# Altium PCB PCB1.PcbDoc
Units mm, origin at the board's own origin, x right, y up, seen from the top; angles counter-clockwise.
Board outline 152.4 x 101.6 mm, 2 copper layers (Top Layer, Bottom Layer); 20 components, 19 nets, 52 pads, 0 vias.
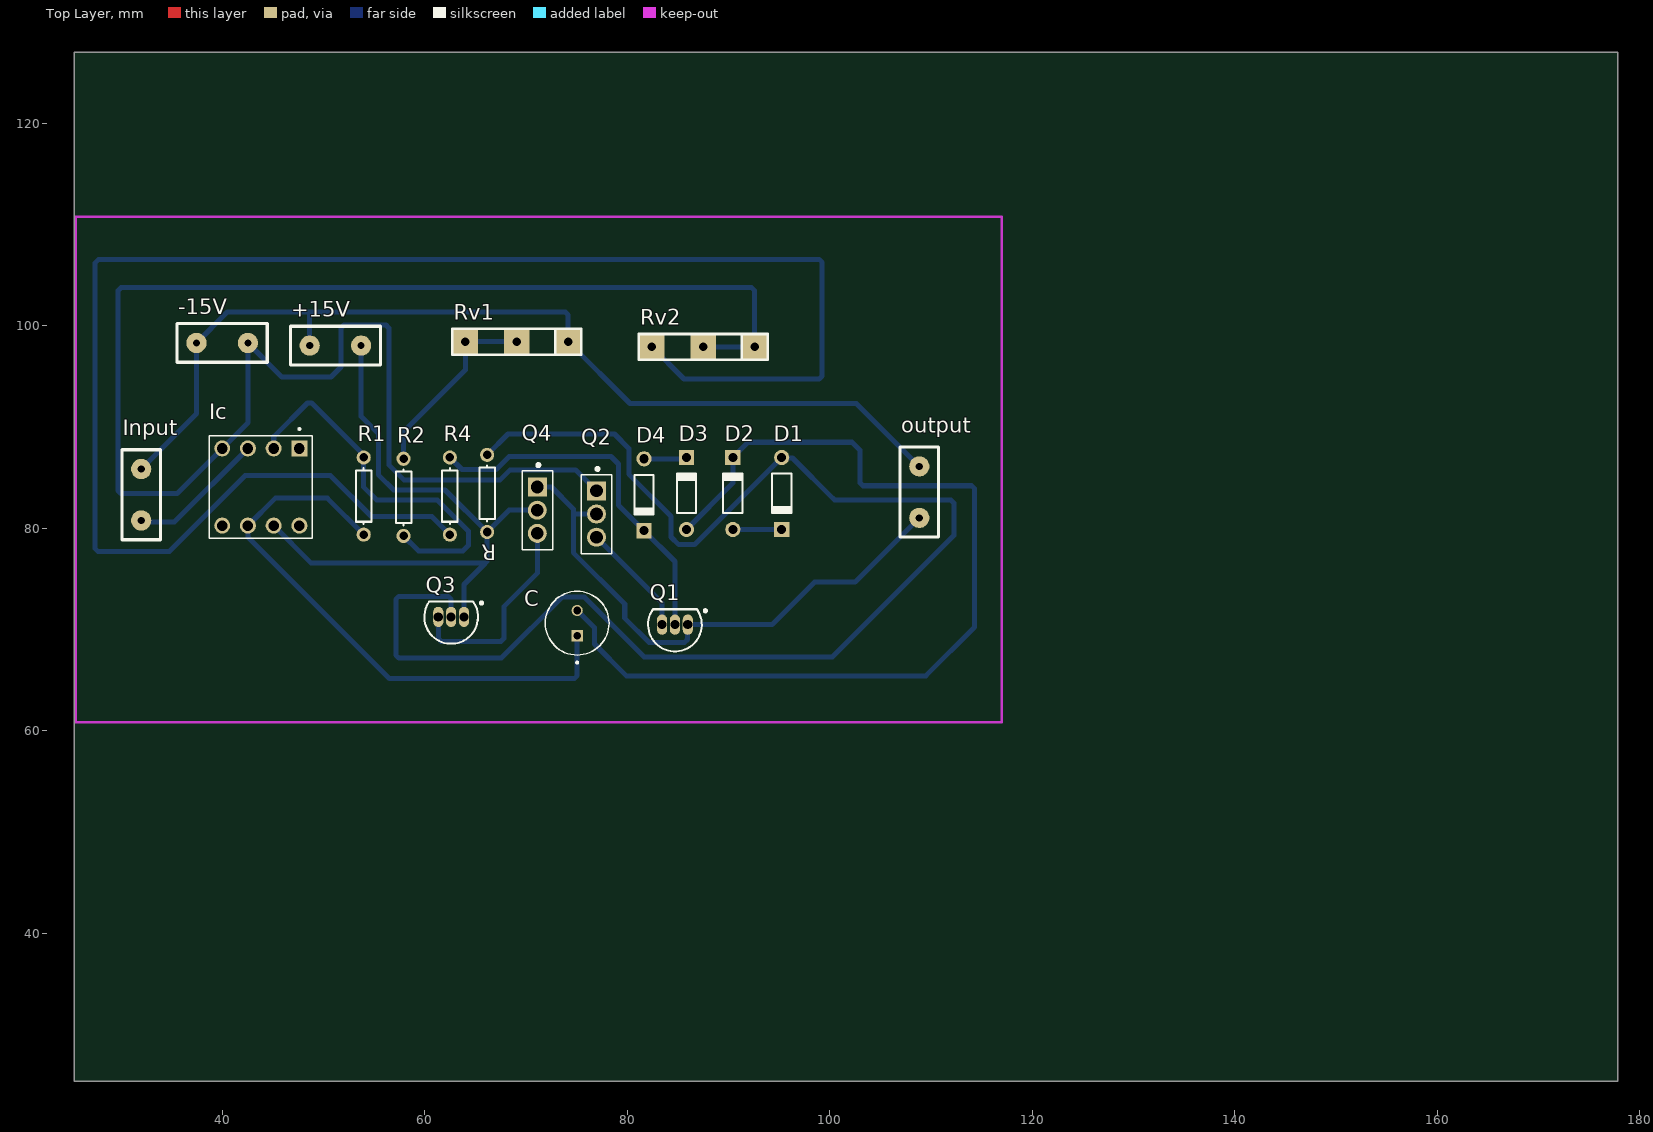
[diagram p0: Top Layer view]
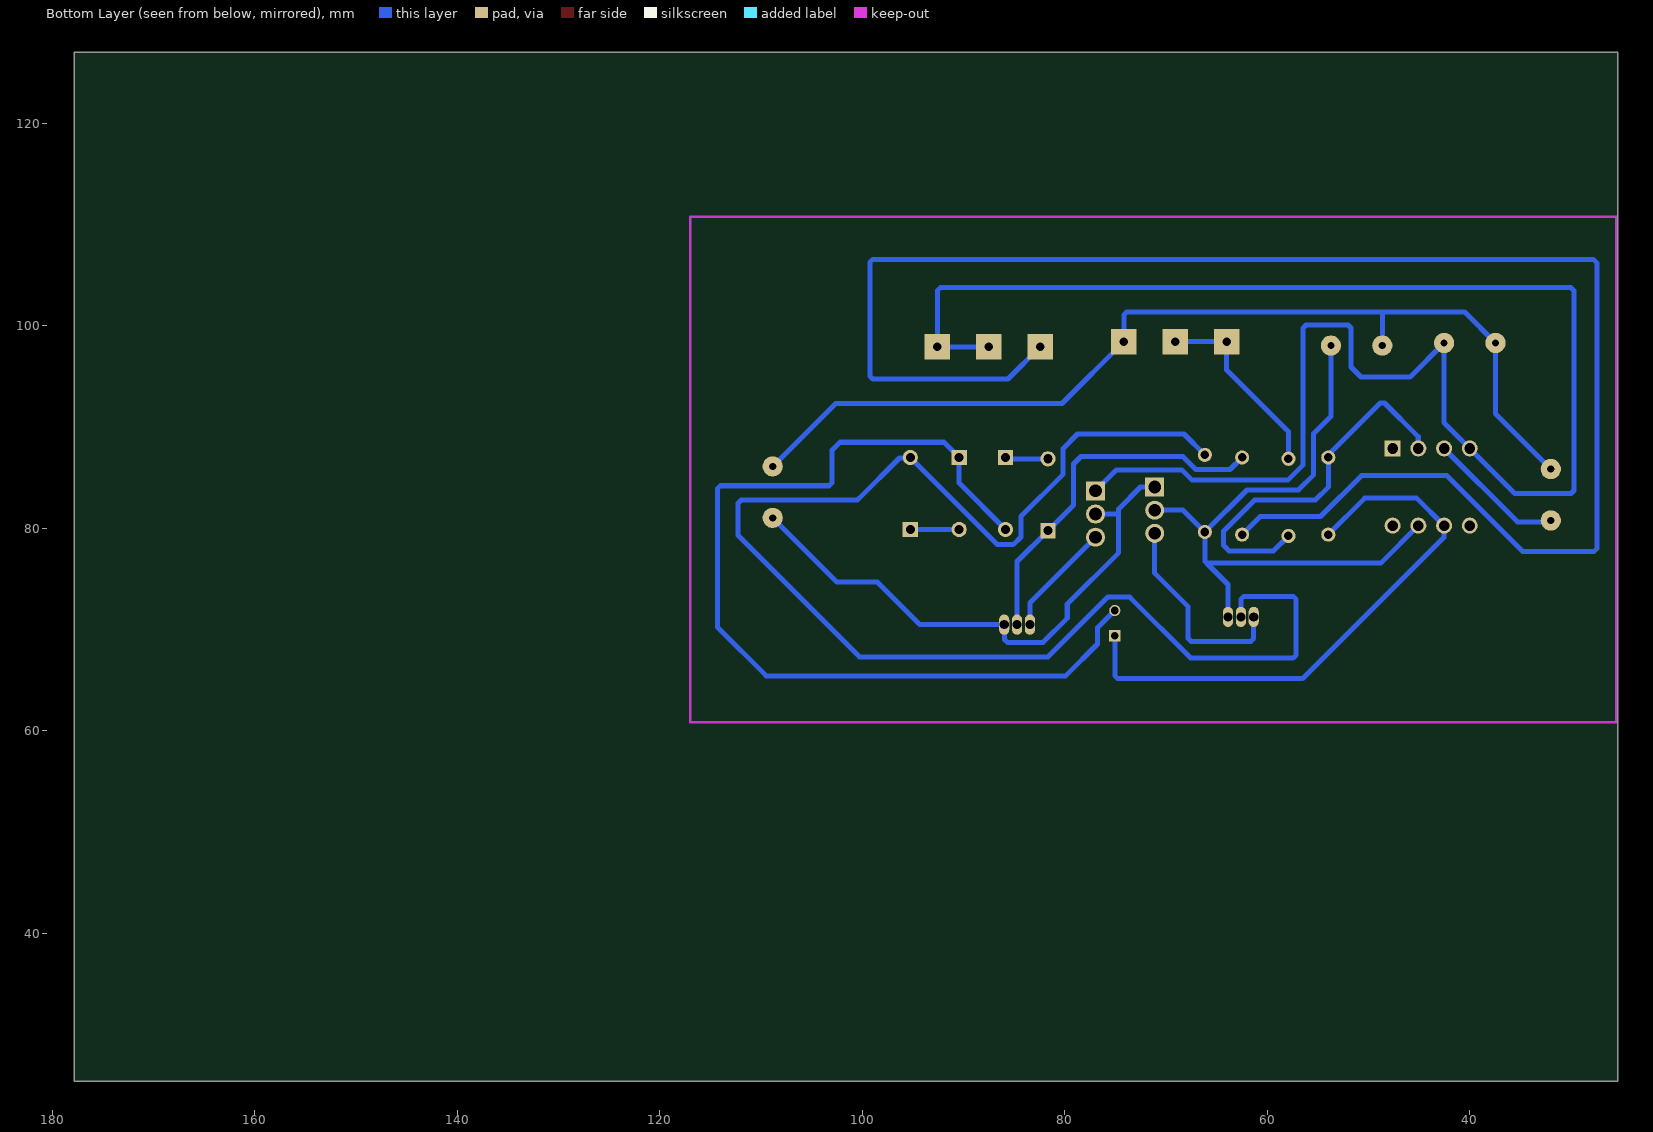
[diagram p1: Bottom Layer view, seen from below]

## Layer stack, top to bottom
Top Solder: solder mask 0.0102, Solder Resist, Dk 3.5
Top Layer: signal copper 0.0356
Dielectric 1: dielectric 0.32, FR-4, Dk 4.8
Bottom Layer: signal copper 0.0356
Bottom Solder: solder mask 0.0102, Solder Resist, Dk 3.5

## Board outline
25.4,25.4 177.8,25.4 177.8,127 25.4,127

## Design rules (kind name [scope] priority, off if disabled: settings)
Clearance [All] p1: gap=0.5 ignorepadtopadclearanceinfootprint=TRUE
PolygonConnect [All] p1: connectstyle=Relief reliefconductorwidth=0.254 reliefentries=4 polygonreliefangle="90 Angle" airgapwidth=0.254
RoutingLayers [All] p1: top layer_v5=FALSE bottom layer_v5=TRUE
RoutingVias [All] p1: holewidth=0.711 width=1.27 viastyle="Through Hole" minholewidth=0.711 minwidth=1.27 maxholewidth=0.711 maxwidth=1.27
SolderMaskExpansion [All] p1: expansion=0.102 istentingtop=FALSE
Width [All] p1: maxlimit=0.5 minlimit=0.5 preferedwidth=0.5
29 further rules are at their usual default settings.

## Components (designator, comment, footprint, x,y, rotation, side; value= is the part's Value field where it differs from the comment)
+15V "HEADER 2" RAD0.2 53.721,98.044 r180 top
-15V "HEADER 2" RAD0.2 42.545,98.298 r180 top
C "EEUEB1E101H" CAPPRD250W50D630H1500 75.057,70.632 r90 top
D1 "Diode 1N4148" DO-35 95.25,83.439 r270 top
D2 "Diode 1N4148" DO-35 90.424,83.439 r90 top
D3 "Diode 1N4148" DO-35 85.852,83.439 r90 top
D4 "Diode 1N4148" DO-35 81.661,83.312 r270 top
Ic "DILB8P-223TLF" AMPHENOL_DILB8P-223TLF 43.815,84.074 r270 top
Input "HEADER 2" RAD0.2 32.004,80.772 r90 top
output "HEADER 2" RAD0.2 108.839,81.026 r90 top
Q1 "NPN" TO-226-AA 84.709,70.485 r90 top
Q2 "BD135" TO229P780X300X2000-3 76.962,83.697 r270 top
Q3 "NPN" TO-226-AA 62.611,71.247 r90 top
Q4 "BD135" TO229P780X300X2000-3 71.12,84.078 r270 top
R "Res1" AXIAL-0.3 66.167,83.439 r270 top value=1K
R1 "" AXIAL-0.3 53.975,83.185 r270 top
R2 "" AXIAL-0.3 57.912,83.058 r270 top
R4 "" AXIAL-0.3 62.484,83.185 r90 top
Rv1 "" POT 74.168,98.425 r180 top
Rv2 "" POT 92.583,97.917 r180 top

## Footprints (in the part's own frame and the unit in brackets; to place one, negate y for a bottom-side part, rotate by r counter-clockwise, add the part's x,y. Pads: shape width x height; smd on the part's side, far side on the other; paste and mask are expansions set on the pad)
AMPHENOL_DILB8P-223TLF [mm]
  rect 1.575x1.575 hole 1.05: 01(-3.81,3.81)
  round 1.575 hole 1.05: 02(-3.81,1.27) 03(-3.81,-1.27) 04(-3.81,-3.81) 05(3.81,-3.81) 06(3.81,-1.27) 07(3.81,1.27) 08(3.81,3.81)
  silkscreen extent -5.83,-5.08 5.08,5.08, body extent -5.08,-5.08 5.08,5.08, height 5.25
AXIAL-0.3 [mm] "Axial Device, Thru-Hole; 2 Leads; 0.3 in Pin Spacing"
  round 1.4 hole 0.85: 1(-3.81,0) 2(3.81,0)
  silkscreen extent -2.77,-0.76 2.77,0.76
CAPPRD250W50D630H1500 [mm]
  round 1.1 hole 0.75: N(1.25,0)
  rect 1.1x1.1 hole 0.75: P(-1.25,0)
  silkscreen extent -4,-3.15 3.15,3.15, body extent -3.15,-3.15 3.15,3.15, height 15
DO-35 [mm] "Diode, Axial; Body 3.8 x 1.9 mm (LxDia. max), Lead Dia. 0.53 mm (max)"
  round 1.5 hole 0.9: 1(-3.55,0)
  rect 1.5x1.5 hole 0.9: 2(3.55,0)
  silkscreen extent -1.95,-0.95 2.05,0.95
POT [mm]
  rect 2.5x2.5 hole 0.813: 1(0,0) 2(5.08,0) 3(10.16,0)
  silkscreen extent -1.27,-1.27 11.43,1.27
RAD0.2 [mm]
  round 2 hole 0.711: 1(0,0) 2(5.08,0)
  silkscreen extent -1.91,-1.91 6.98,1.91
TO229P780X300X2000-3 [mm]
  rect 1.875x1.875 / inner round 1.875 / far side rect 1.875x1.875 hole 1.25: 1(0,0)
  round 1.875 hole 1.25: 2(2.29,0) 3(4.58,0)
  silkscreen extent -2.31,-1.5 6.19,1.5, body extent -3.8,-1.52 3.8,1.14, height 13.2
TO-226-AA [mm] "TO, Flat Index; 3 In-Line, Axial Leads; Body Dia. 4.8mm; Leads 0.55 x 0.51 mm (max)"
  oval 2x1 hole 0.9: 1(0,-1.27) 2(0,0) 3(0,1.27)
  silkscreen extent -2.65,-3.13 1.52,2.65, body extent -2.65,-2.66 1.52,2.66, height 5.33

## Part data
C: "CAP ALUM 100UF 20% 25V RADIAL", Package="RADIAL-2 Panasonic", Availability="Not in stock", Check_prices=https://www.snapeda.com/parts/EEU-EB1E101H/Panasonic/view-part/6221297/?ref=eda, MF="Panasonic Electronic Components", MP=EEU-EB1E101H, Price=None, SnapEDA_Link=https://www.snapeda.com/parts/EEU-EB1E101H/Panasonic/view-part/6221297/?ref=snap
D1 D2 D3 D4: "High Conductance Fast Diode", Code_JEDEC=DO-204-AH, ComponentLink1Description="Manufacturer Link", ComponentLink1URL=http://www.fairchildsemi.com/, ComponentLink2Description=Datasheet, ComponentLink2URL=http://www.fairchildsemi.com/ds/1N%2F1N4148.pdf, DatasheetVersion=1997, LatestRevisionDate=17-Jul-2002, LatestRevisionNote="Re-released for DXP Platform.", PackageDescription="Diode, Axial; Body 3.8 x 1.9 mm (LxDia. max), Lead Dia. 0.53 mm (max)", PackageReference=DO-35, Published=8-Jun-2000, Publisher="Altium Limited"
Ic: "DIP Socket, Stamped and Formed", Package=None, Availability="In Stock", Check_prices=https://www.snapeda.com/parts/DILB8P-223TLF/Amphenol+FCI/view-part/?ref=eda, MF="Amphenol ICC", MP=DILB8P-223TLF, Price=None, Purchase-URL=https://pricing.snapeda.com/search/part/DILB8P-223TLF/?ref=eda, SnapEDA_Link=https://www.snapeda.com/parts/DILB8P-223TLF/Amphenol+FCI/view-part/?ref=snap
Q1 Q3: "NPN Bipolar Transistor", Code_JEDEC=TO-226-AA, LatestRevisionDate=17-Jul-2002, LatestRevisionNote="Re-released for DXP Platform.", PackageDescription="TO, Flat Index; 3 In-Line, Axial Leads; Body Dia. 4.8mm; Leads 0.55 x 0.51 mm (max)", PackageReference=TO-226-AA, Published=8-Jun-2000, Publisher="Altium Limited"
Q2 Q4: "TRANSISTOR, NPN, TO-126; Transistor Polarity:NPN; Collector Emitter Voltage V(br)ceo:45V; Power Dissipation Pd:12.5W; DC Collector Current:1A; DC Current Gain hFE:40; Transistor Case Style:TO-126; No. of Pins:3; SVHC:No SVHC (18-Jun-2012); Collector Emitter Voltage Vces:500mV; Continuous Collector Current Ic Max:1A; Current Ic Continuous a Max:1A; Current Ic hFE:150mA; Full Power Rating Temperature:25Â°C; Hfe Min:40; No. of Transistors:1; Package / Case:TO-126; Power Dissipation Pd:12.5W; Power Dissipation Ptot Max:12.5W; Termination Type:Through Hole; Voltage Vcbo:45V", Package="TO-225-3 ON Semiconductor", Availability="In Stock", Check_prices=https://www.snapeda.com/parts/BD135/Onsemi/view-part/?ref=eda, MF="ON Semiconductor", MP=BD135, Price=None, Purchase-URL=https://pricing.snapeda.com/search/part/BD135/?ref=eda, SnapEDA_Link=https://www.snapeda.com/parts/BD135/Onsemi/view-part/?ref=snap
R: "Resistor", LatestRevisionDate=17-Jul-2002, LatestRevisionNote="Re-released for DXP Platform.", PackageDescription="Axial Device, Thru-Hole; 2 Leads; 0.3 in Pin Spacing", PackageReference=AXIAL-0.3, Published=8-Jun-2000, Publisher="Altium Limited"
R1 R2 R4: library part Res1, "Resistor", LatestRevisionDate=17-Jul-2002, LatestRevisionNote="Re-released for DXP Platform.", PackageDescription="Axial Device, Thru-Hole; 2 Leads; 0.3 in Pin Spacing", PackageReference=AXIAL-0.3, Published=8-Jun-2000, Publisher="Altium Limited"
Rv1 Rv2: library part POTENTIOMETER, "Potentiometer"

## Nets (pads, with @x,y where several pads share a name; then routed paths per layer and width w, separated by ;. In a path a pad name is that pad's centre, name@x,y a point inside that pad or via, vN(x,y) a via of type N, cw(c..) or ccw(c..) an arc to the next point about the centre after c; other vN are vias at no path point)
GND: +15V.2 -15V.2 Input.2 output.2 Rv1.1 | length 98.5
  Bottom Layer w0.5: Input.2 37.465,91.313 -15V.2 40.513,101.346 48.641,101.346 ; +15V.2 48.641,101.346 ; output.2 102.616,92.329 80.264,92.329 Rv1.1 74.168,101.053 73.875,101.346 48.641,101.346
Net+15V_1: +15V.1 Ic.07 Q3.1 Q4.2 R.2 | length 64.1
  Bottom Layer w0.5: Ic.07 48.793,76.556 65.989,76.556 66.167,76.733 ; +15V.1 53.721,91.059 55.425,89.355 55.425,85.291 56.931,83.785 62.011,83.785 R.2 ; Q3.1 63.881,74.447 65.954,76.52 ; 66.167,76.783 R.2 ; Q4.2 68.326,81.788 R.2
Net-15V_1: -15V.1 Ic.04 Q2.1 Rv2.1 Rv2.2 | length 172.9
  Bottom Layer w0.5: Q2.1 74.883,85.776 68.445,85.776 67.454,84.785 57.944,84.785 56.462,86.267 56.462,99.784 56.169,100.077 52.033,100.077 51.74,99.784 51.74,95.936 50.749,94.945 45.898,94.945 -15V.1 42.545,90.424 Ic.04 35.56,83.439 30.011,83.439 29.718,83.732 29.718,103.466 30.011,103.759 92.29,103.759 92.583,103.466 Rv2.1 Rv2.2
NetC_N: C.N D2.2 D3.1 | length 95.8
  Bottom Layer w0.5: C.N 76.759,70.18 76.759,68.58 79.908,65.43 109.474,65.43 114.3,70.256 114.3,83.908 114.007,84.201 103.269,84.201 102.976,84.494 102.976,87.705 102.187,88.494 91.929,88.494 D2.2 90.424,84.461 D3.1
NetC_P: C.P Ic.06 R1.2 | length 57.5
  Bottom Layer w0.5: R1.2 50.38,82.97 45.251,82.97 Ic.06 42.561,80.248 42.561,79.105 56.515,65.151 74.764,65.151 75.057,65.444 C.P
NetD1_1: D1.1 Q3.2 R.1 | length 140.9
  Bottom Layer w0.5: Q3.2 62.611,72.986 62.318,73.279 57.443,73.279 57.15,72.986 57.15,67.476 57.443,67.183 67.564,67.183 73.584,73.203 75.768,73.203 81.661,67.31 100.275,67.31 112.268,79.303 112.268,82.483 111.975,82.776 100.485,82.776 100.339,82.922 96.322,86.939 95.3,86.939 D1.1 86.645,78.384 85.09,78.384 84.328,79.146 84.328,81.177 80.161,85.344 80.161,87.885 78.74,89.306 68.224,89.306 R.1
NetD1_2: D1.2 D2.1 | length 4.8
  Bottom Layer w0.5: D2.1 D1.2
NetD3_2: D3.2 D4.1 | length 4.2
  Bottom Layer w0.5: D4.1 85.725,86.862 D3.2
NetD4_2: D4.2 Q1.2 R4.2 | length 36.2
  Bottom Layer w0.5: R4.2 63.68,85.799 67.054,85.799 68.351,87.097 78.384,87.097 79.14,86.341 79.14,82.283 D4.2 84.709,76.714 Q1.2
NetIc_02: Ic.02 R1.1 R2.2 | length 37.5
  Bottom Layer w0.5: Ic.02 45.095,87.894 45.095,89.048 48.423,92.376 48.838,92.376 53.803,87.411 53.803,87.167 R1.1 53.975,84.065 55.254,82.785 61.249,82.785 64.313,79.721 64.313,78.308 63.754,77.749 59.411,77.749 R2.2
NetIc_03: Ic.03 Input.1 | length 13.6
  Bottom Layer w0.5: Input.1 32.142,80.634 35.295,80.634 Ic.03
Netoutput_1: output.1 Q1.1 Q2.2 Q4.1 | length 55.6
  Bottom Layer w0.5: Q4.1 72.513,84.078 74.676,81.915 74.676,81.407 ; Q2.2 74.676,81.407 ; output.1 102.489,74.676 98.489,74.676 94.297,70.485 Q1.1 85.959,70.465 85.959,69.028 85.666,68.735 82.141,68.735 79.756,71.12 79.756,72.517 74.676,77.597 74.676,81.407
NetQ1_3: Q1.3 Q2.3 | length 11.3
  Bottom Layer w0.5: Q2.3 83.439,72.64 Q1.3
NetQ3_3: Q3.3 Q4.3 | length 20.6
  Bottom Layer w0.5: Q3.3 61.341,69.127 61.634,68.834 67.525,68.834 67.818,69.127 67.818,72.263 71.12,75.565 Q4.3
"NetQ correct_1": 
"NetQ correct_2": 
"NetQ correct_3": 
NetR2_1: R2.1 Rv1.2 Rv1.3 | length 19.2
  Bottom Layer w0.5: R2.1 57.912,89.535 64.008,95.631 Rv1.3 Rv1.2
NetR4_1: R4.1 Rv2.3 | length 170.4
  Bottom Layer w0.5: R4.1 60.706,81.153 54.737,81.153 50.698,85.192 42.266,85.192 34.798,77.724 27.725,77.724 27.432,78.017 27.432,106.172 27.813,106.553 98.953,106.553 99.246,106.26 99.246,95.035 98.953,94.742 85.598,94.742 Rv2.3
pads on no net: Ic.01 Ic.05 Ic.08

## Keep-outs
Keep-Out Layer:
  lines w0.254: 25.527,60.833 116.84,60.833 116.967,60.833 116.967,110.744 25.527,110.744 25.527,60.833